# Altium PCB PCB1.PcbDoc
Units mil, origin at the board's own origin, x right, y up, seen from the top; angles counter-clockwise.
Board outline 6000 x 4000 mil, 4 copper layers (Top Layer, GND, 3.3V, Bottom Layer), stack 23.756 mil thick; 6 components, 3 nets, 53 pads, 4 vias.
Unrouted connection lines stored in the file: 6.
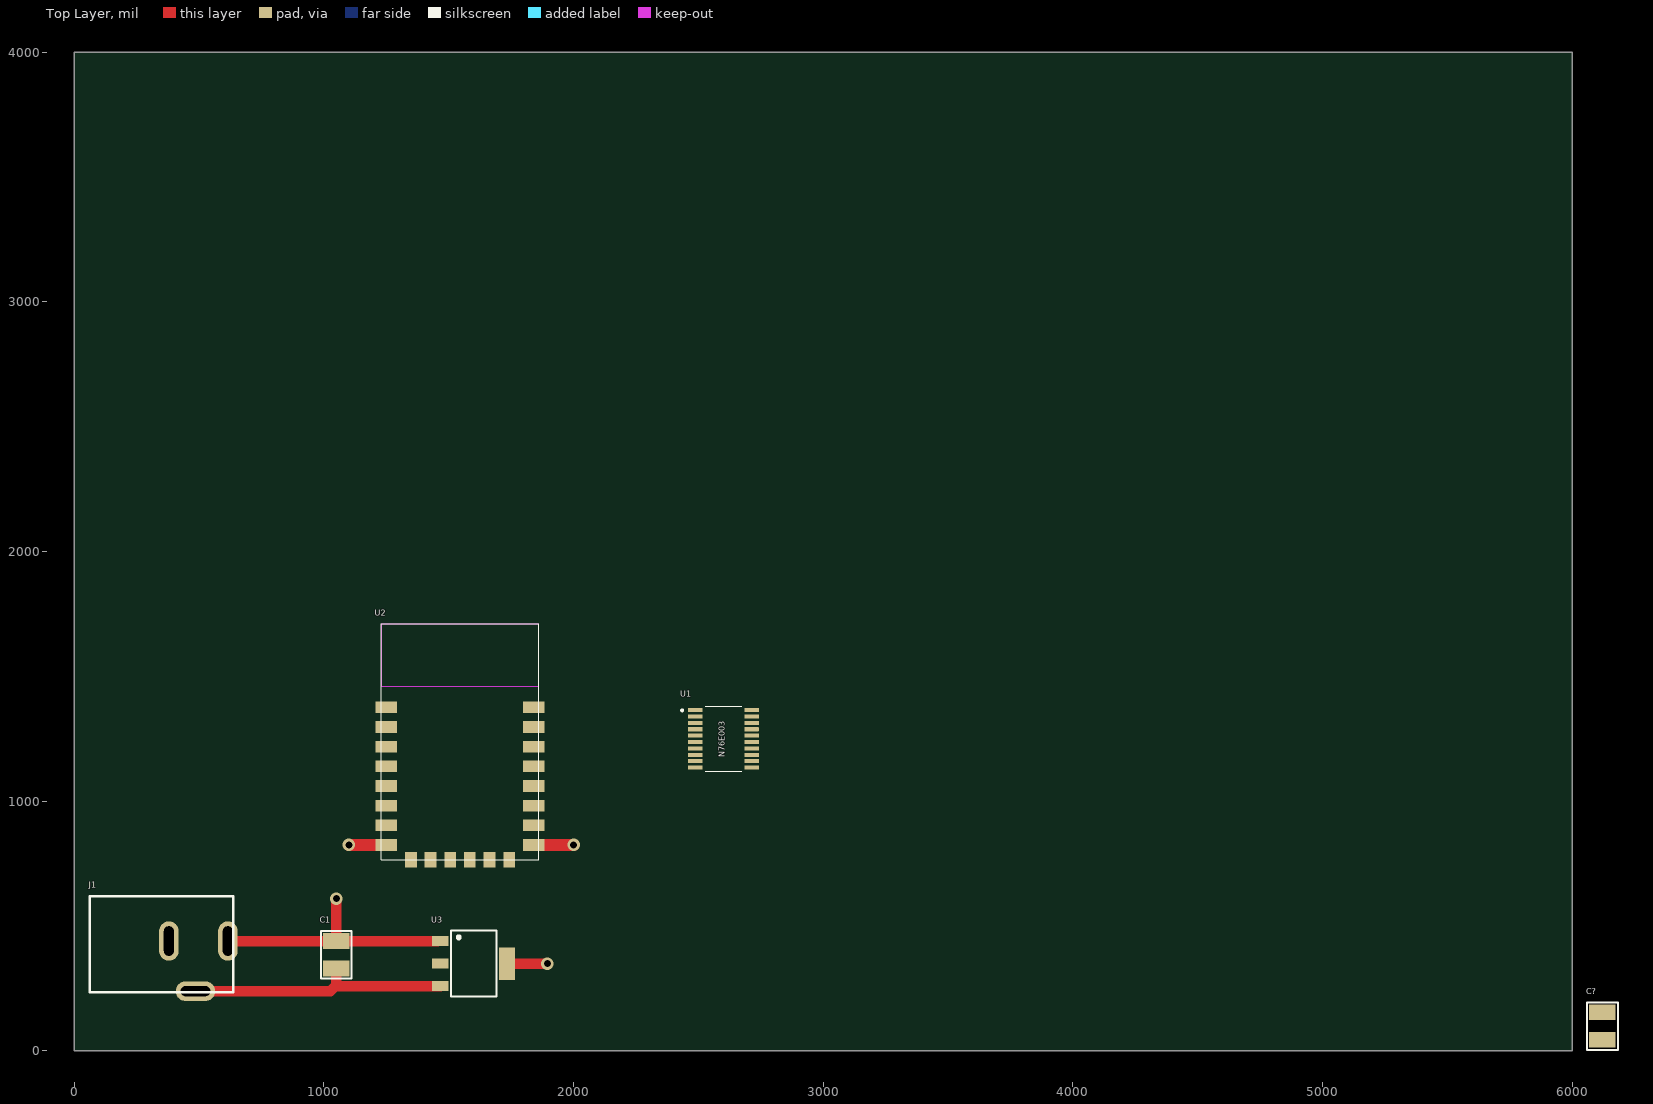
[diagram p0: Top Layer view]
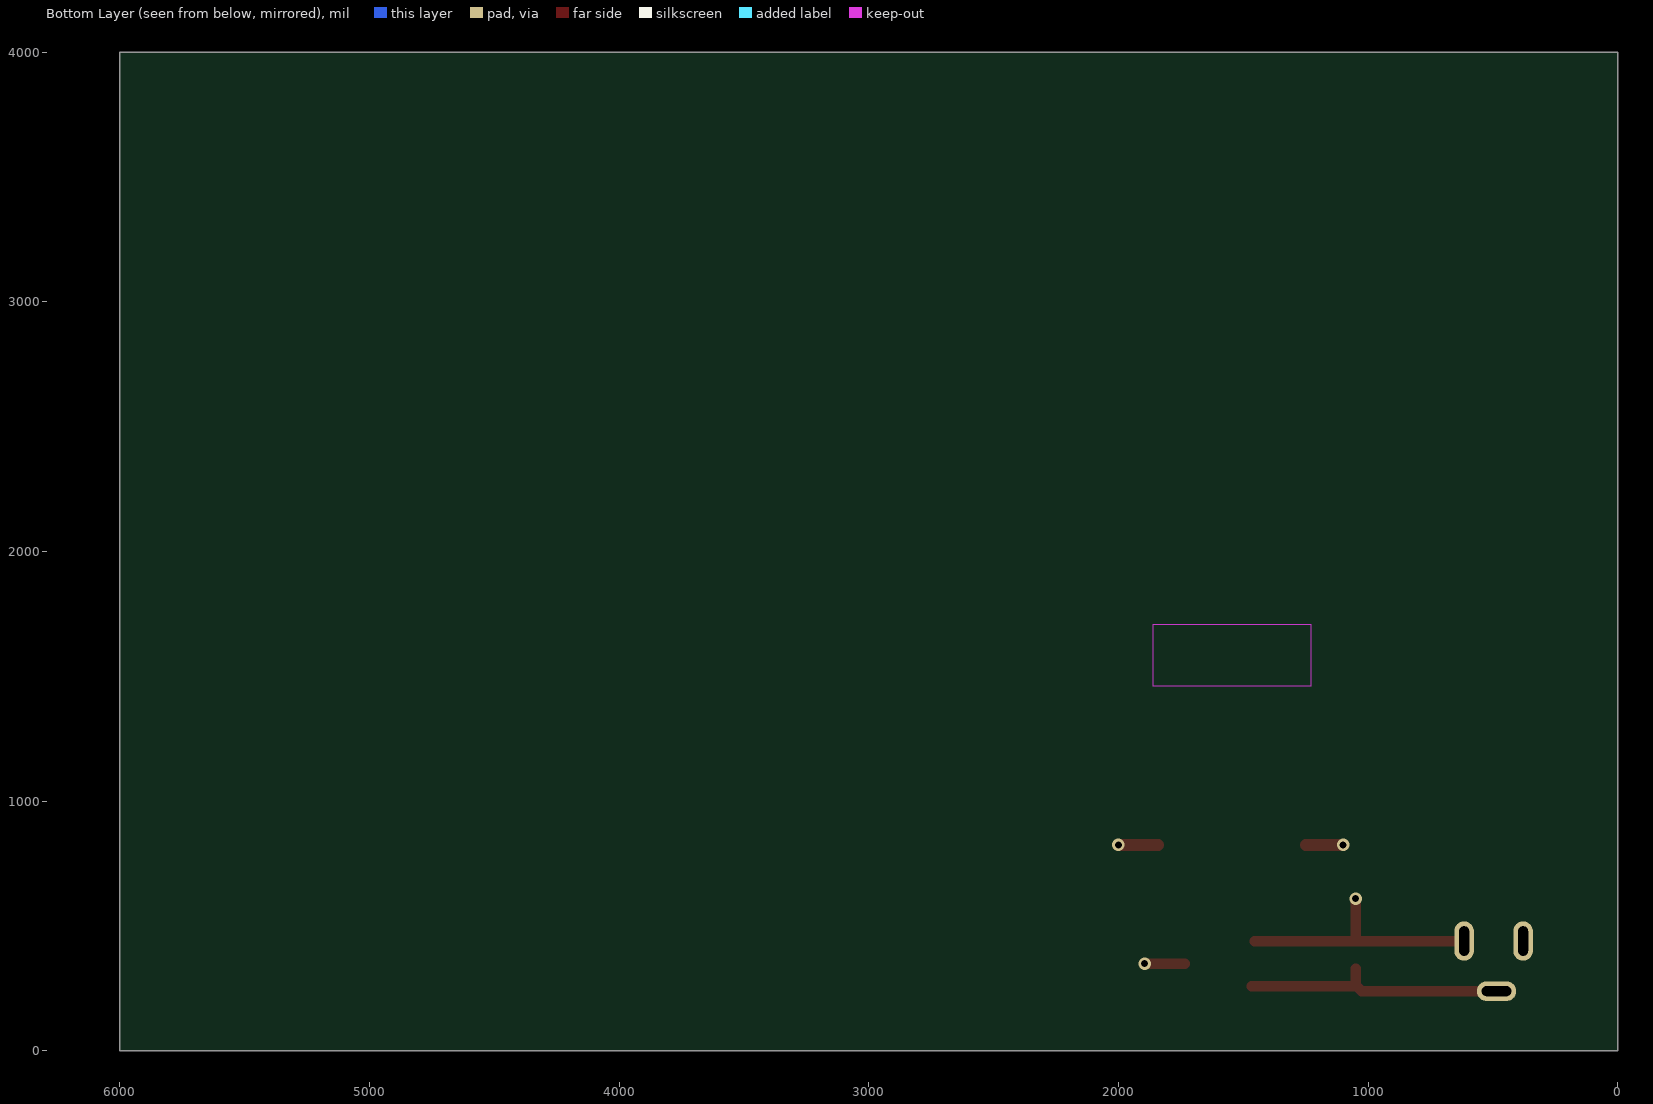
[diagram p1: Bottom Layer view, seen from below]
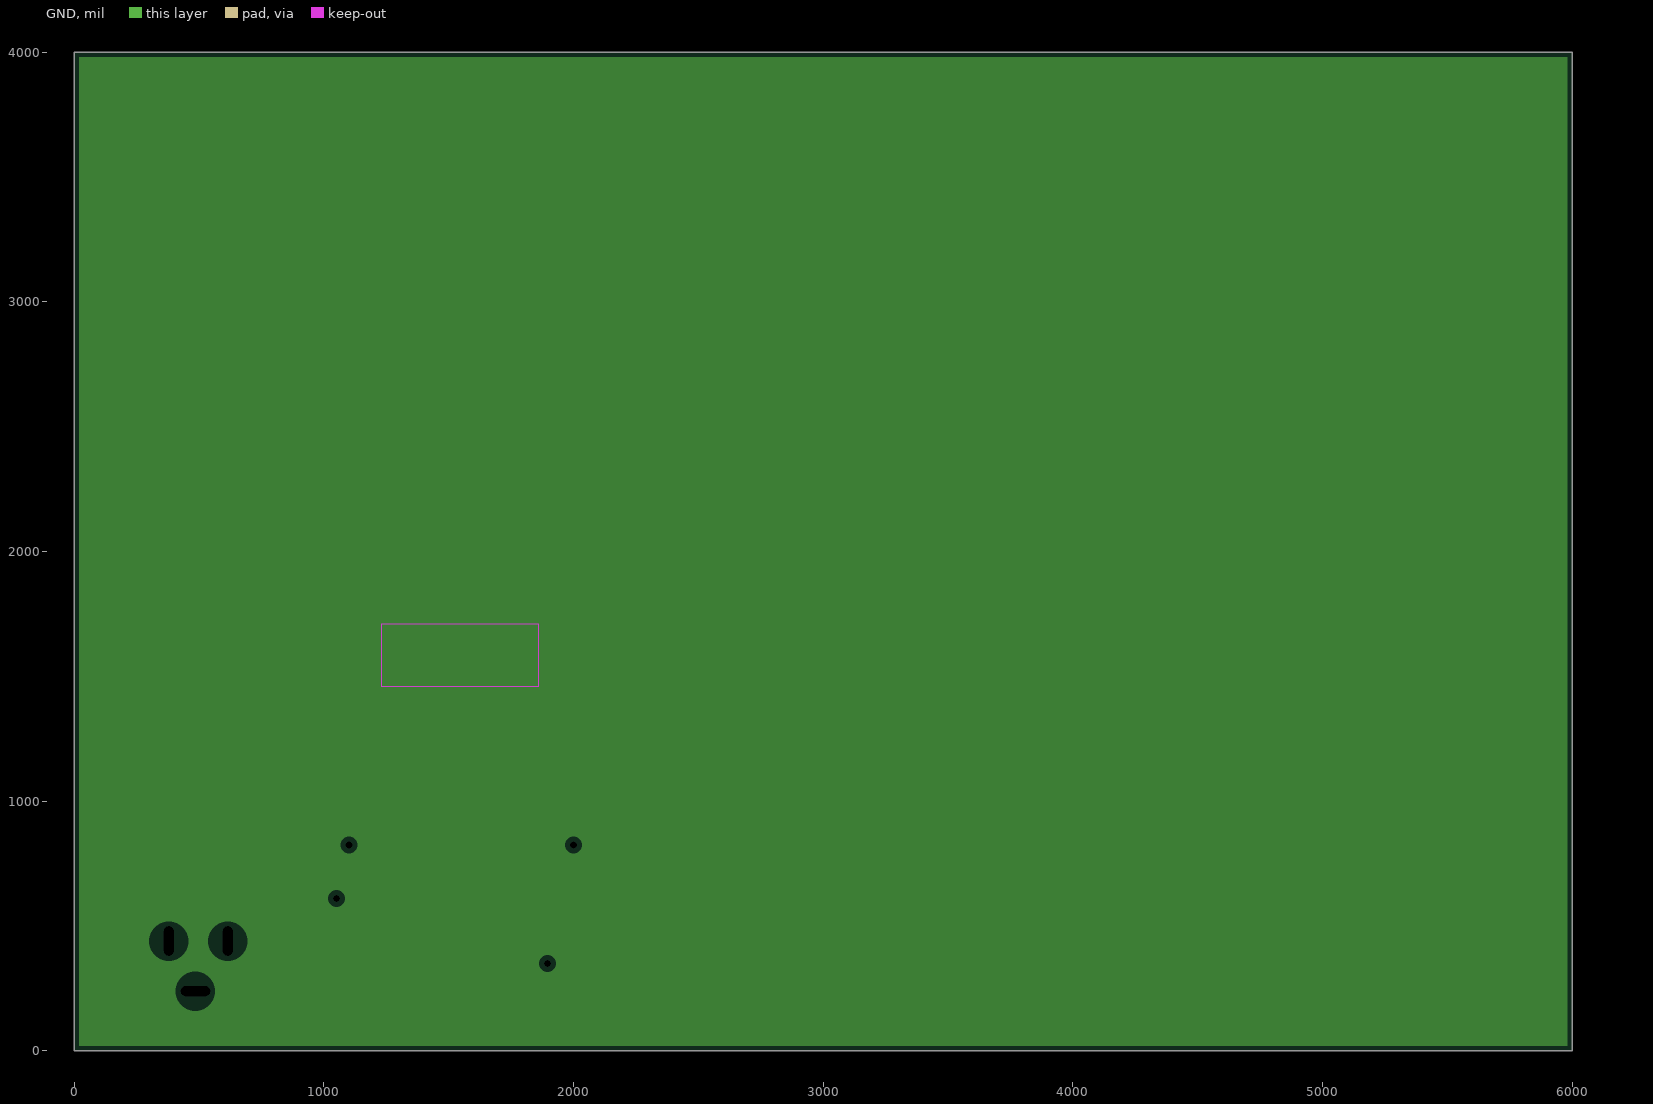
[diagram p2: GND, clearances drawn from the general rule]
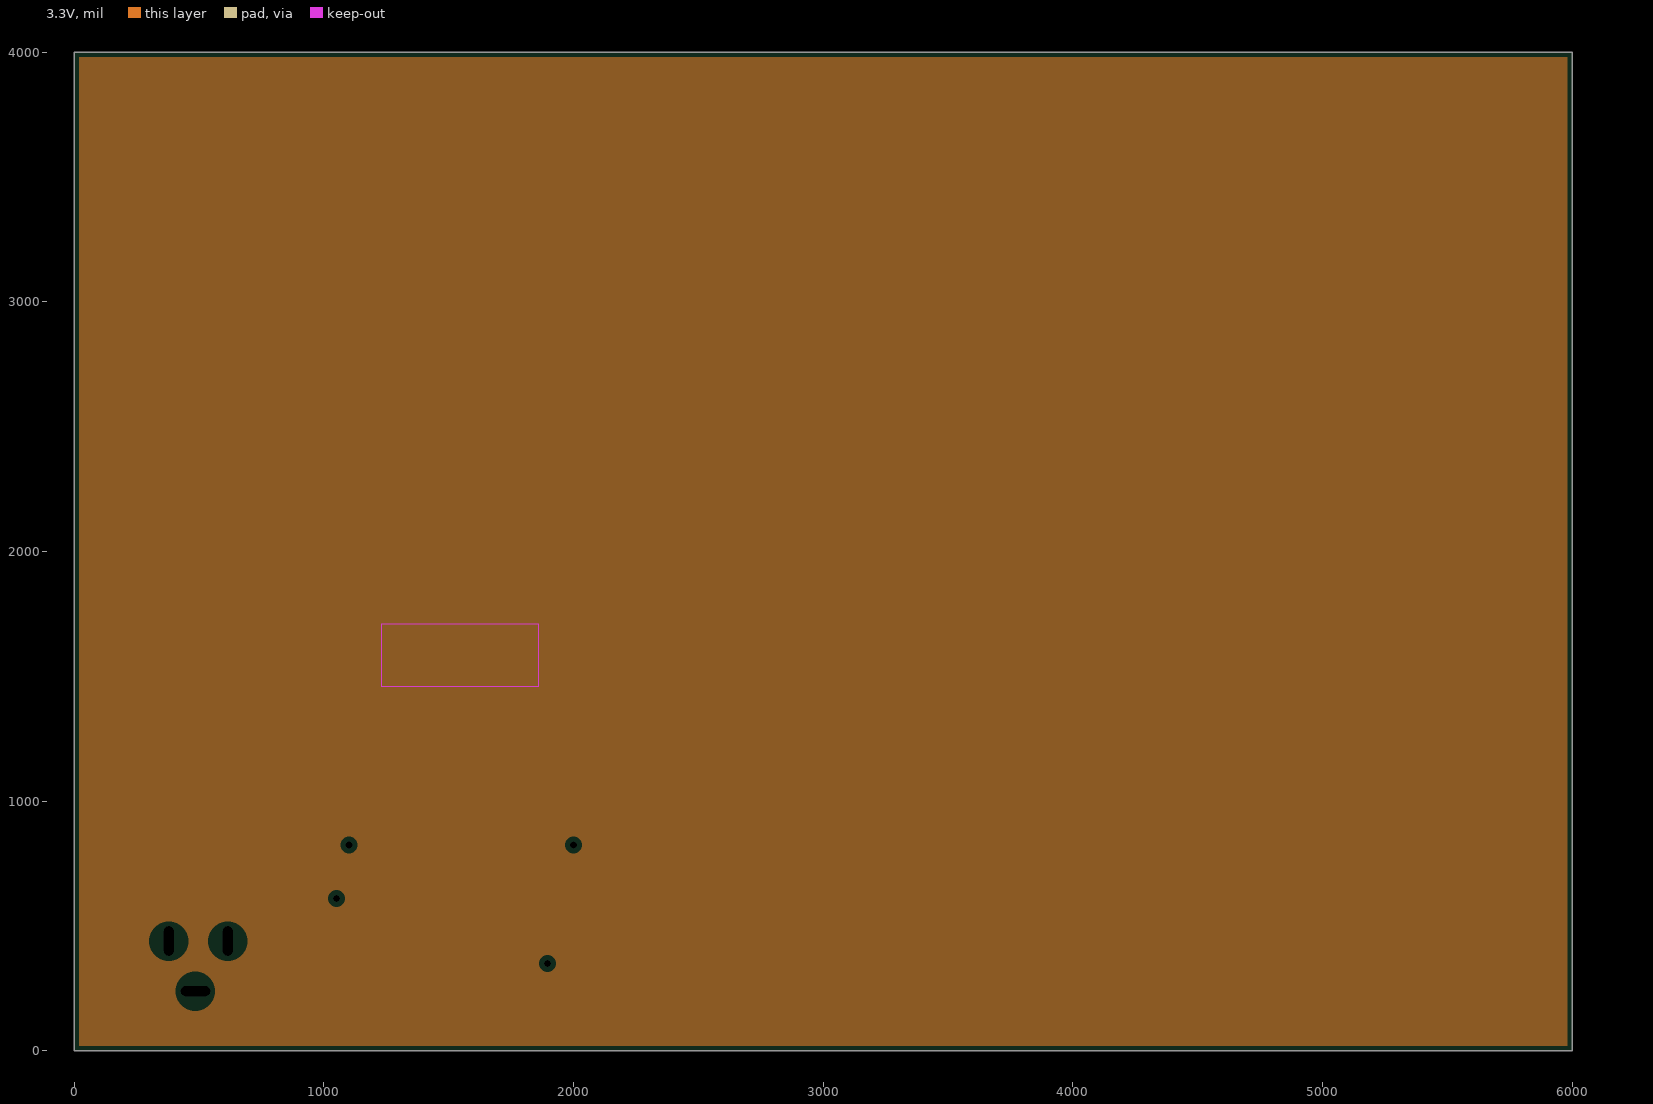
[diagram p3: 3.3V, clearances drawn from the general rule]

## Layer stack, top to bottom
Top Solder: solder mask 0.4, Solder Resist, Dk 3.5
Top Layer: signal copper 1.4
Dielectric 2: prepreg 2.8, PP-006, Dk 4.1
GND: plane copper 1.378
Dielectric 1: dielectric 12.6, FR-4, Dk 4.8
3.3V: plane copper 1.378
Dielectric 3: prepreg 2.8, PP-006, Dk 4.1
Bottom Layer: signal copper 1.4
Bottom Solder: solder mask 0.4, Solder Resist, Dk 3.5

## Board outline
0,0 6000,0 6000,4000 0,4000

## Design rules (kind name [scope] priority, off if disabled: settings)
Clearance [All] p1: gap=10 ignorepadtopadclearanceinfootprint=FALSE
HoleToHoleClearance [All] p1: gap=5 allowstackedmicrovias=TRUE
MinimumSolderMaskSliver [All] p1: minsoldermaskwidth=4
PlaneClearance [All] p1: clearance=20
PlaneConnect [All] p1: planeconnectstyle=Relief reliefexpansion=20 reliefentries=4 reliefconductorwidth=10 reliefairgap=10
PolygonConnect [All] p1: connectstyle=Relief reliefconductorwidth=10 reliefentries=4 polygonreliefangle="90 Angle" airgapwidth=10
RoutingVias [All] p1: holewidth=28 width=50 viastyle="Through Hole" minholewidth=28 minwidth=50 maxholewidth=28 maxwidth=50
SilkToSilkClearance [All] p1: silktosilkclearance=1
SilkToSolderMaskClearance [IsPad] p1: minsilkscreentomaskgap=2 clearancetoexposedcopper=TRUE
SolderMaskExpansion [All] p1: expansion=4 istentingtop=FALSE
SupplyNets "Schematic Supply Nets_2" [InNet('+5V')] p1: voltage=0.000
SupplyNets "Schematic Supply Nets_1" [InNet('+3.3V')] p2: voltage=0.000
SupplyNets "Schematic Supply Nets" [InNet('GND')] p3: voltage=0.000
Width [All] p1: maxlimit=60 minlimit=10 preferedwidth=10
24 further rules are at their usual default settings.

## Components (designator, comment, footprint, x,y, rotation, side; value= is the part's Value field where it differs from the comment)
C1 "10uF" MY_1210 1050,385 r270 top
C? "10uF" MY_1210 6120,100 r90 top
J1 "JACK P4" JACK_P4 350,427.62 r180 top
U1 "N76E003AT20" SOP65P640X120-20N 2600,1250 r0 top
U2 "ESP-12F" ESP-12F 1545.28,1071.06 r0 top
U3 "AMS1117" AMS1117 1600,350 r0 top

## Footprints (in the part's own frame and the unit in brackets; to place one, negate y for a bottom-side part, rotate by r counter-clockwise, add the part's x,y. Pads: shape width x height; smd on the part's side, far side on the other; paste and mask are expansions set on the pad)
AMS1117 [mm] "SOT-223"
  rect 1.65x1 smd: 1(-3.4,2.29) 2(-3.4,0) 3(-3.4,-2.29)
  rect 1.65x3.3 smd: 2(3.4,0)
  silkscreen extent -2.3,-3.35 2.3,3.35, body extent -3.6,-3.25 3.4,3.25, height 1.87
ESP-12F [mm] "Chip SMD 22 Pads 16x24mm w/ Antenna."
  rect 2.2x1.2 smd: 1(-7.5,7.75) 2(-7.5,5.75) 3(-7.5,3.75) 4(-7.5,1.75) 5(-7.5,-0.25) 6(-7.5,-2.25) 7(-7.5,-4.25) 8(-7.5,-6.25) 15(7.5,-6.25) 16(7.5,-4.25) 17(7.5,-2.25) 18(7.5,-0.25) 19(7.5,1.75) 20(7.5,3.75) 21(7.5,5.75) 22(7.5,7.75)
  rect 1.2x1.6 smd: 9(-5,-7.75) 10(-3,-7.75) 11(-1,-7.75) 12(1,-7.75) 13(3,-7.75) 14(5,-7.75)
  Keep-Out Layer region: -8,9.916 8,9.916 8,16.216 -8,16.216
  silkscreen extent -8,-7.75 8,16.25, body extent -8.02,-7.8 8,16.21, height 2.85
JACK_P4 [mm]
  oval 2x4 hole 1 slot 3 at 90 deg: 1(-6.747,-0.318) 2(-0.747,-0.318)
  oval 4x2 hole 1 slot 3 at 0 deg: 3(-3.447,4.782)
  silkscreen extent -7.3,-4.89 7.3,4.89, body extent -7.27,-4.92 7.23,4.88, height 11.38
MY_1210 [mm]
  rect 1.6x2.7 smd: 1(-1.4,0) 2(1.4,0)
  silkscreen extent -2.44,-1.57 2.41,1.55, body extent -1.6,-1.25 1.6,1.25, height 0.59
SOP65P640X120-20N [mm]
  rrect10% 1.48x0.41 smd paste+0 mask+0.102: 1(-2.865,2.925) 2(-2.865,2.275) 3(-2.865,1.625) 4(-2.865,0.975) 5(-2.865,0.325) 6(-2.865,-0.325) 7(-2.865,-0.975) 8(-2.865,-1.625) 9(-2.865,-2.275) 10(-2.865,-2.925) 11(2.865,-2.925) 12(2.865,-2.275) 13(2.865,-1.625) 14(2.865,-0.975) 15(2.865,-0.325) 16(2.865,0.325) 17(2.865,0.975) 18(2.865,1.625) 19(2.865,2.275) 20(2.865,2.925)
  silkscreen extent -4.3,-3.3 1.87,3.3, body extent -3.2,-3.3 3.2,3.3, height 1.2

## Part data
C1 C?: library part "Cap ceramic", "None polar capacitor", ASiD Part Number=C-AS, Volte=10V
J1: library part JACK_P4, "9V Battery Connector Jack P4."
U1: "8051 Mcu, Shape: t", Package=None, Check_prices=https://www.snapeda.com/parts/N76E003AT20-T/Nuvoton/view-part/?ref=eda, MF=Nuvoton, MP=N76E003AT20-T, SnapEDA_Link=https://www.snapeda.com/parts/N76E003AT20-T/Nuvoton/view-part/?ref=snap
U2: "Chip SMD 22 Pads Wifi 2.4GHz BLE 4.2 16x24mm w/ Antenna.", JLCPCB PN=C82891, ComponentLink1Description=Datasheet, ComponentLink1URL=https://docs.ai-thinker.com/_media/esp8266/docs/esp-12f_product_specification_en.pdf
U3: "IC REG LINEAR 1A SOT-89-3L", JLCPCB PN=C963410, ComponentLink1Description=Datasheet, ComponentLink1URL=http://www.advanced-monolithic.com/pdf/ds1117.pdf, Digikey PN=4518-AMS1117-3.3CT-ND

## Via types
v1: diameter 50, hole 28, Top Layer to Bottom Layer, 4 vias

## Nets (pads, with @x,y where several pads share a name; then routed paths per layer and width w, separated by ;. In a path a pad name is that pad's centre, name@x,y a point inside that pad or via, vN(x,y) a via of type N, cw(c..) or ccw(c..) an arc to the next point about the centre after c; other vN are vias at no path point)
+3.3V: C?.2 U2.8 U3.2 | length 311.1
  Top Layer w42: U3.2@1733.86,350 v1(1895,350)
  Top Layer w47: v1(1100,825) U2.8
+5V: C1.2 J1.3 U3.3 | length 1058.3
  Top Layer w42: J1.3 1025.4,239.33 1050,263.94 ; C1.2 1050,263.94 ; U3.3 1054.09,259.84 1050,263.94
GND: C1.1 C?.1 J1.1 J1.2 U2.15 U3.1 | length 1168.4
  Top Layer w42: J1.1 C1.1 v1(1050,610) ; C1.1 U3.1@1454.66,440.14
  Top Layer w47: U2.15 v1(2000,825)
pads on no net: U1.1 U1.2 U1.3 U1.4 U1.5 U1.6 U1.7 U1.8 U1.9 U1.10 U1.11 U1.12 U1.13 U1.14 U1.15 U1.16 U1.17 U1.18 U1.19 U1.20 U2.1 U2.2 U2.3 U2.4 U2.5 U2.6 U2.7 U2.9 U2.10 U2.11 U2.12 U2.13 U2.14 U2.16 U2.17 U2.18 U2.19 U2.20 U2.21 U2.22

## Polygon pours and split planes (outlines as drawn)
no net on GND (split plane): 5979.9,20.1 20.1,20.1 20.1,3979.9 5979.9,3979.9
no net on 3.3V (split plane): 5979.9,20.1 20.1,20.1 20.1,3979.9 5979.9,3979.9

## Text inside footprints (layer, text, board x,y; h text height)
U1: Top Overlay "N76E003" at 2612.53,1176.42 h40 r90